# Altium PCB autonomiczny_odkurzacz_pcb.PcbDoc
Units mm, origin at the board's own origin, x right, y up, seen from the top; angles counter-clockwise.
Board outline 62.55 x 71.25 mm, 2 copper layers (Signal Top Layer, Signal Bottom Layer), stack 0.142 mm thick; 18 components, 44 nets, 169 pads, 11 vias.
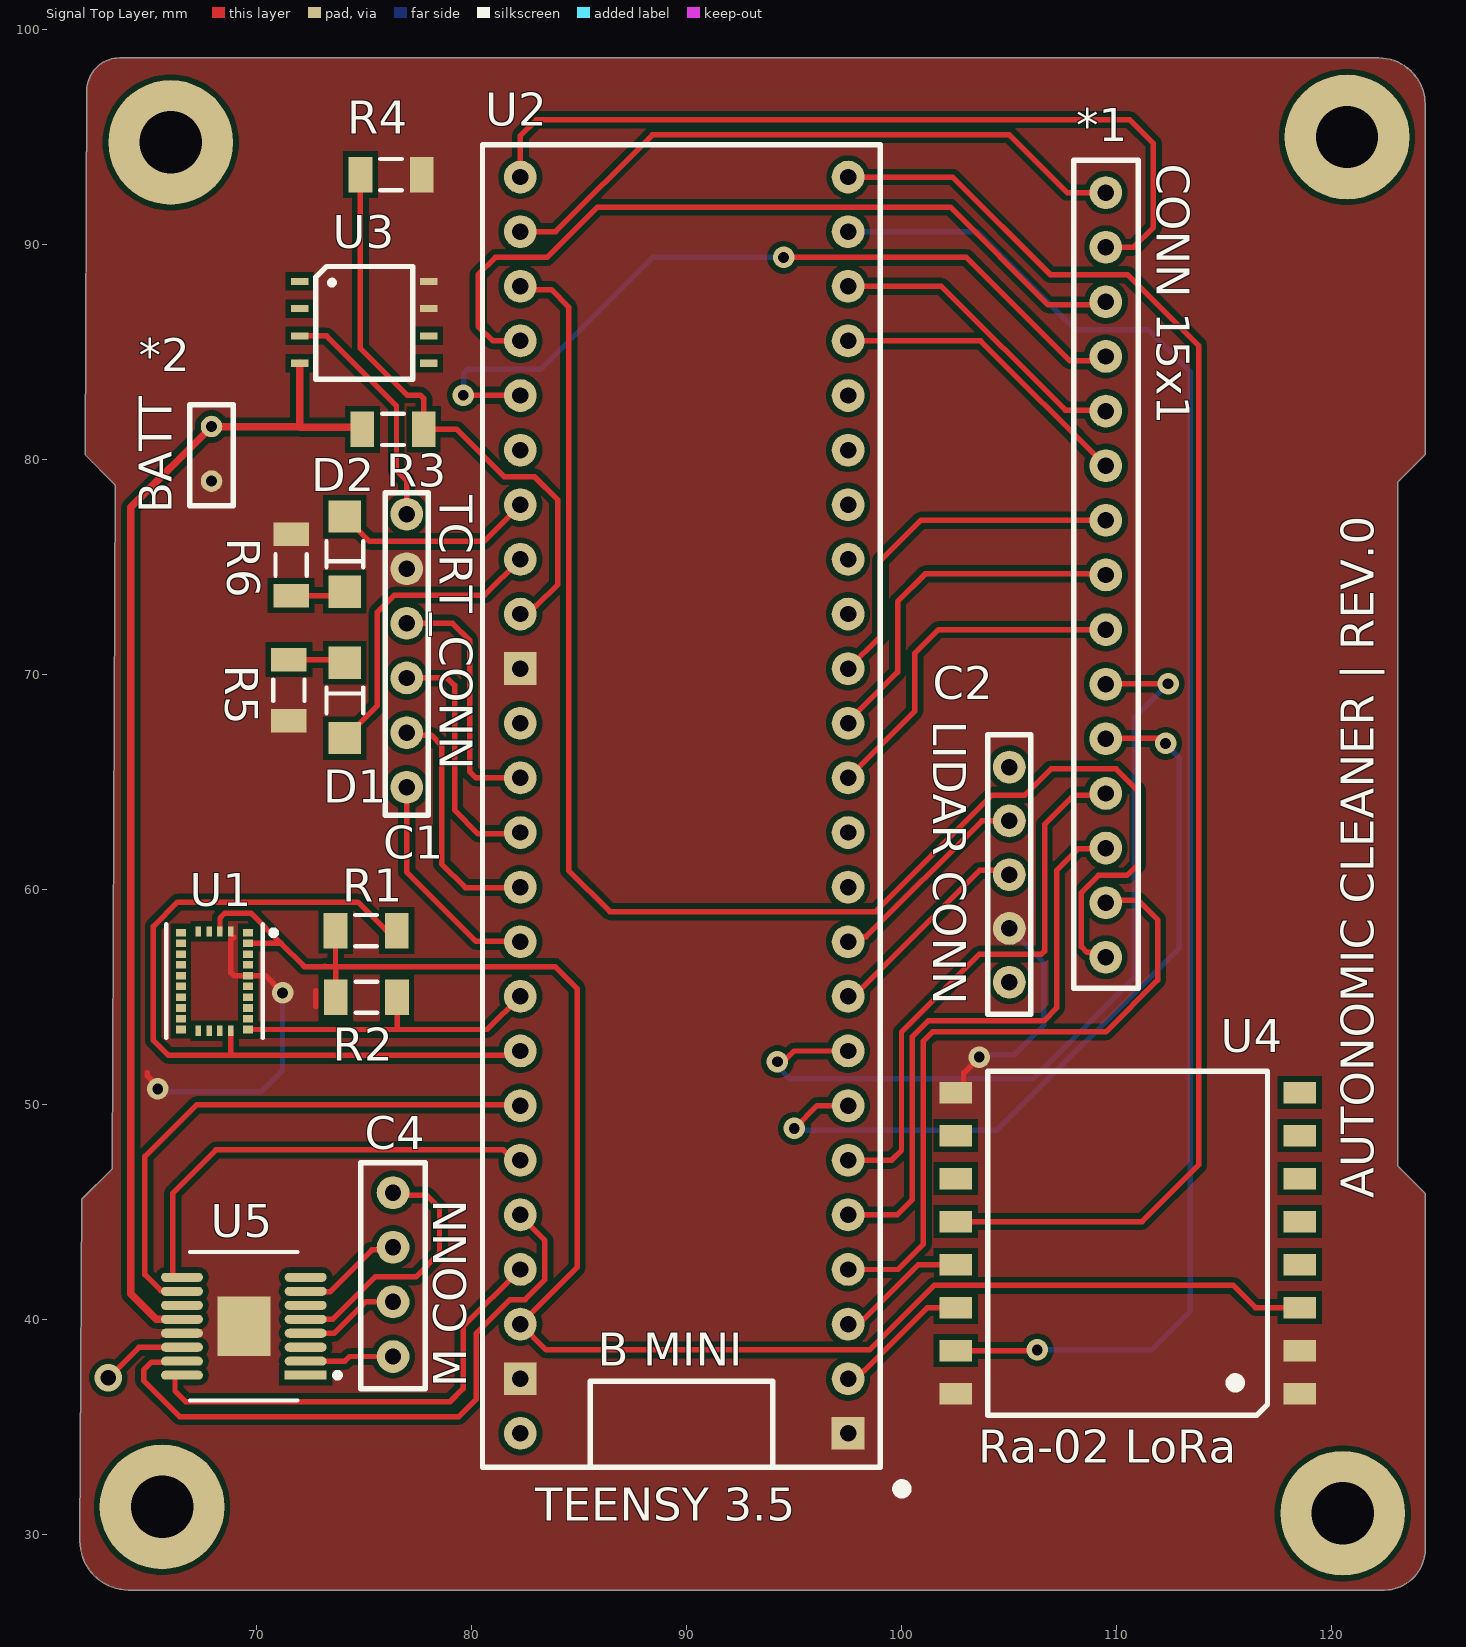
[diagram p0: Signal Top Layer view]
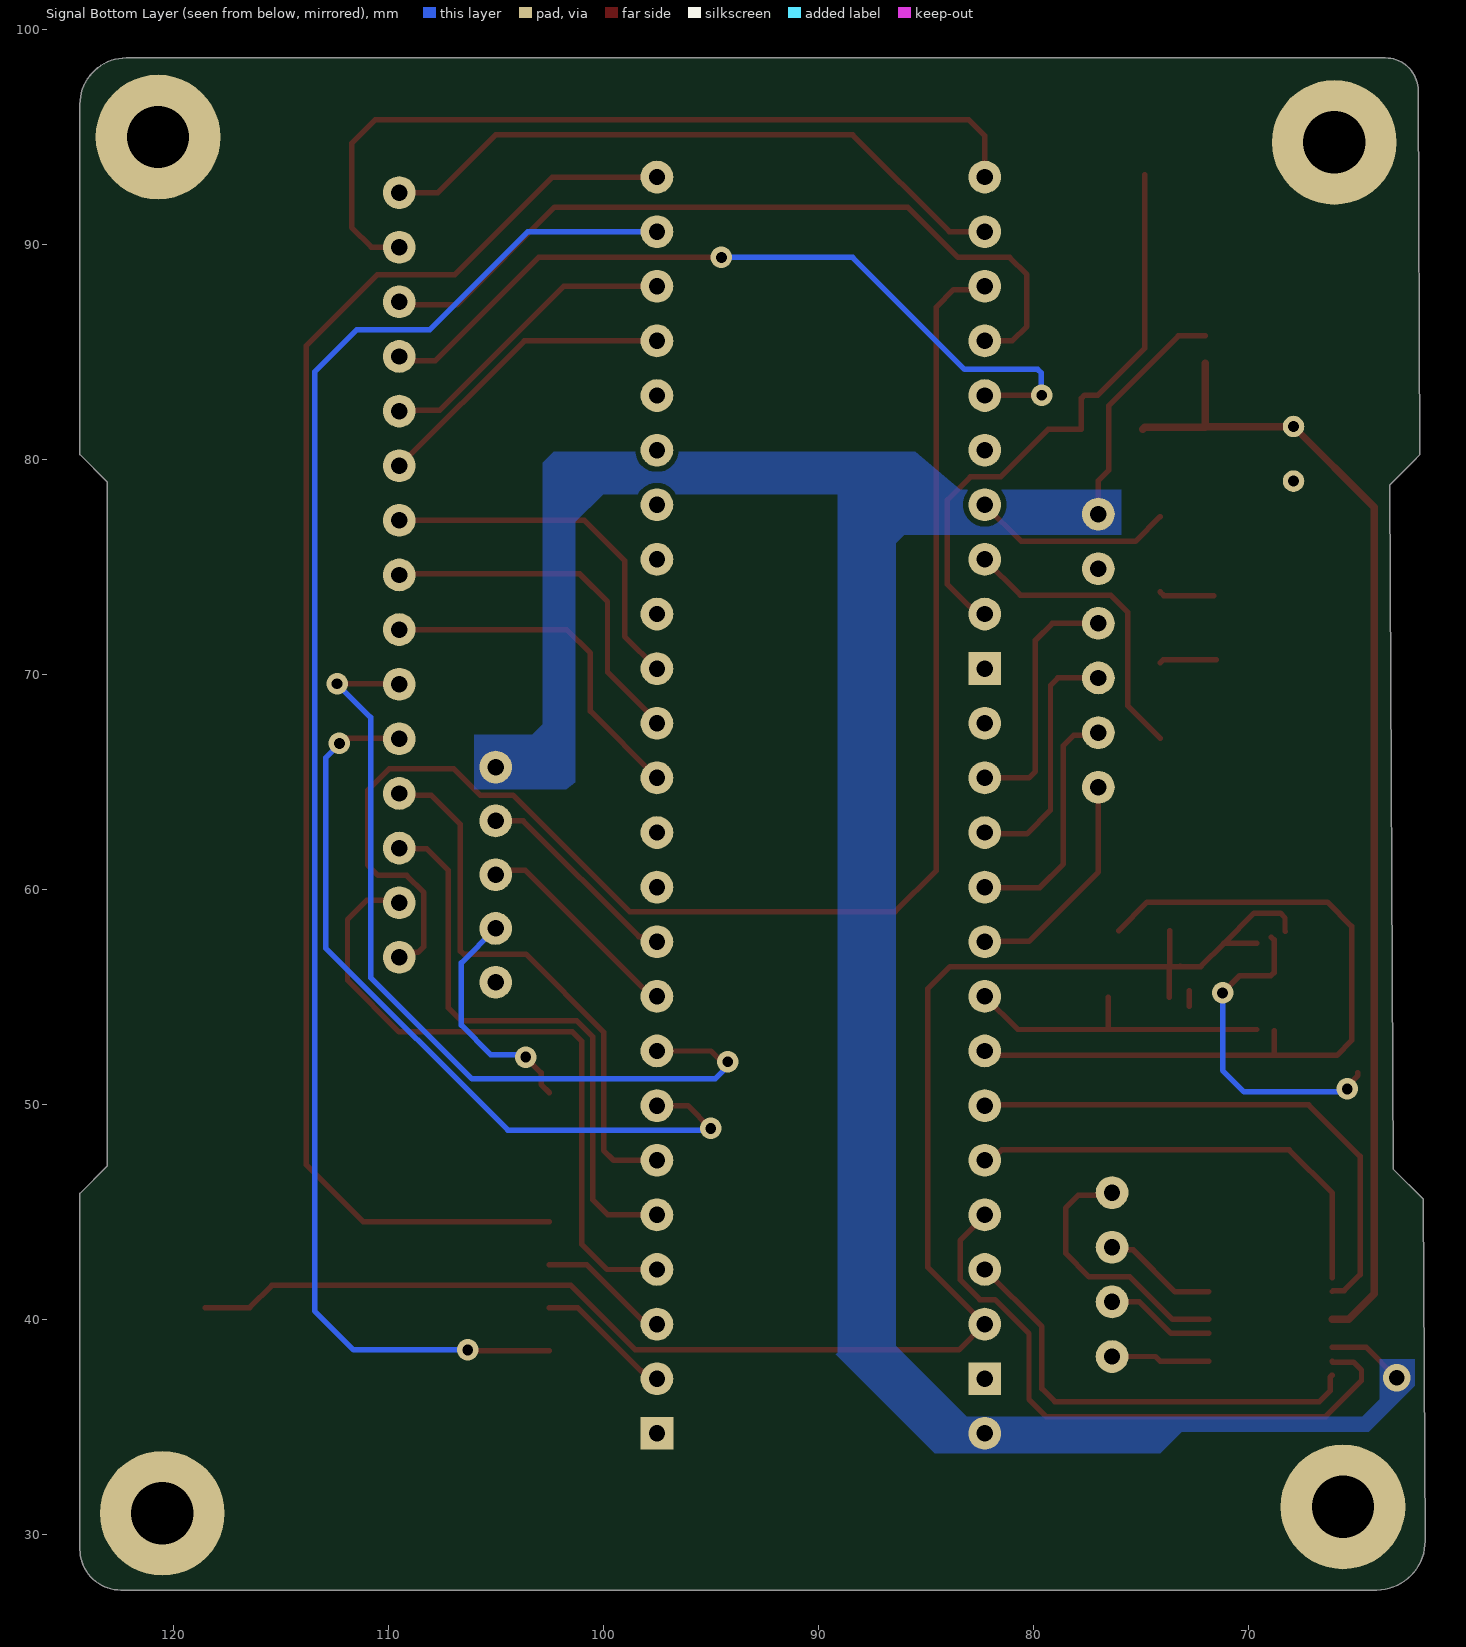
[diagram p1: Signal Bottom Layer view, seen from below]

## Layer stack, top to bottom
Top Solder: solder mask 0.0102, Solder Resist, Dk 3.5
Signal Top Layer: signal copper 0.0356
Dielectric 1: prepreg 0.0711, PP-006, Dk 4.1
Signal Bottom Layer: signal copper 0.0356
Bottom Solder: solder mask 0.0102, Solder Resist, Dk 3.5

## Board outline
61.781,29.728 61.856,45.608 63.274,47.013 63.425,78.813 63.039,79.203 62.36,79.888 62.021,80.231 62.102,97.154 cw(c63.627,97.154) 63.627,98.679 122.174,98.679 cw(c122.174,96.52) 124.333,96.52 124.333,80.232 123.063,78.962 123.063,47.149 124.333,45.879 124.333,29.337 cw(c122.428,29.337) 122.428,27.432 64.033,27.433 cw(c64.054,29.706)

## Design rules (kind name [scope] priority, off if disabled: settings)
Clearance [All] p1: gap=0.254 ignorepadtopadclearanceinfootprint=TRUE except(0.1: Arc-SMDPad Track-SMDPad)
ComponentClearance [All] p1: gap=0.05 collisioncheckmode=3 verticalgap=0.05 showdistances=FALSE
PolygonConnect [All] p1: connectstyle=Direct reliefconductorwidth=0.254 reliefentries=4 polygonreliefangle="90 Angle" airgapwidth=0.254
RoutingVias [All] p1: holewidth=0.711 width=1.27 viastyle="Through Hole" minholewidth=0.2 minwidth=0.4 maxholewidth=4 maxwidth=5
SolderMaskExpansion [All] p1: expansion=0.102 istentingtop=FALSE
SupplyNets "Schematic Supply Nets_3" [InNet('+12')] p1: voltage=0.000
SupplyNets "Schematic Supply Nets_2" [InNet('3.3V')] p2: voltage=0.000
SupplyNets "Schematic Supply Nets_1" [InNet('+5')] p3: voltage=0.000
SupplyNets "Schematic Supply Nets" [InNet('GND')] p4: voltage=0.000
Width [All] p1: maxlimit=1 minlimit=0.05 preferedwidth=0.254 minimp=50.000000 maximp=50.000000 favimp=50.000000
29 further rules are at their usual default settings.

## Components (designator, comment, footprint, x,y, rotation, side; value= is the part's Value field where it differs from the comment)
*1 "conn_15" PCBComponent_1#1 109.486,92.416 r180 top
*2 "batt" conn_2 67.9,79 r0 top
C1 "tcrt5000" PCBComponent_1#2 78.053,78.516 r180 top
C2 "a2m8_lidar" PCBComponent_1#3 105,65.7 r180 top
C4 "motor_conn" PCBComponent_1#4 76.339,38.294 r0 top
D1 "HSMG-C150" FP-HSMG-C150-MFG 74.1,68.8 r270 top
D2 "HSMG-C150" FP-HSMG-C150-MFG 74.1,75.6 r90 top
R1 "4.7k" RESC3216X70X50NL05T20 75.1,55 r180 top
R2 "4.7k" RESC3216X70X50NL05T20 75.089,58.1 r180 top
R3 "ERJ-8GEY0R00V" RESC3216X70X50NL05T20 76.339,81.403 r180 top
R4 "ERJ-8GEY0R00V" RESC3216X70X50NL05T20 76.25,93.25 r180 top
R5 "300R" RESC3216X70X50NL05T20 71.5,69.275 r270 top
R6 "300R" RESC3216X70X50NL05T20 71.6,75.1 r90 top
U1 "BNO055" FP-BNO055-MFG 68.038,55.75 r0 top
U2 "TEENSY" PCBComponent_1#5 97.5,93.14 r180 top
U3 "XL2011E1" PCBComponent_1#6 72,84.48 r0 top
U4 "LORA RA-02" PCBComponent_1#7 118.503,50.569 r180 top
U5 "DRV8833PWPR" FP-PWP0016C-IPC_A 69.4,39.7 r180 top

## Footprints (in the part's own frame and the unit in brackets; to place one, negate y for a bottom-side part, rotate by r counter-clockwise, add the part's x,y. Pads: shape width x height; smd on the part's side, far side on the other; paste and mask are expansions set on the pad)
conn_2 [mm]
  round 1 hole 0.5: 0(0,0) 1(0,2.54)
  silkscreen extent -1.02,-1.14 1.02,3.56
FP-BNO055-MFG [mm]
  rect 0.475x0.35 smd paste+0 mask-1000: 1(1.562,2.25) 6(-1.562,2.25) 7(-1.562,1.75) 8(-1.562,1.25) 9(-1.562,0.75) 10(-1.562,0.25) 11(-1.562,-0.25) 12(-1.562,-0.75) 13(-1.562,-1.25) 14(-1.562,-1.75) 15(-1.562,-2.25) 20(1.562,-2.25) 21(1.562,-1.75) 22(1.562,-1.25) 23(1.562,-0.75) 24(1.562,-0.25) 25(1.562,0.25) 26(1.562,0.75) 27(1.562,1.25) 28(1.562,1.75)
  rect 0.25x0.475 smd paste+0 mask-1000: 2(0.75,2.312) 3(0.25,2.312) 4(-0.25,2.312) 5(-0.75,2.312) 16(-0.75,-2.312) 17(-0.25,-2.312) 18(0.25,-2.312) 19(0.75,-2.312)
  silkscreen extent -2.25,-2.65 2.88,2.65, body extent -2.45,-3.15 2.45,3.15, height 0.25
FP-HSMG-C150-MFG [mm]
  rect 1.5x1.5 smd paste+0 mask+0: 1(-1.75,0) 2(1.75,0)
  silkscreen extent -0.6,-0.85 0.6,0.85, body extent -2.6,-0.95 2.6,0.95, height 0.25
FP-PWP0016C-IPC_A [mm]
  rect 1.955x0.421 smd paste+0 mask+0: 1(-2.875,2.275)
  rrect100% 1.955x0.421 smd paste+0 mask+0: 2(-2.875,1.625) 3(-2.875,0.975) 4(-2.875,0.325) 5(-2.875,-0.325) 6(-2.875,-0.975) 7(-2.875,-1.625) 8(-2.875,-2.275) 9(2.875,-2.275) 10(2.875,-1.625) 11(2.875,-0.975) 12(2.875,-0.325) 13(2.875,0.325) 14(2.875,0.975) 15(2.875,1.625) 16(2.875,2.275)
  rect 2.46x2.77 smd paste-1000 mask+0: 17(0,0)
  silkscreen extent -4.48,-3.45 2.5,3.45, body extent -4.35,-3 4.35,3, height 0.25
PCBComponent_1#1 [mil]
  round 60 hole 30: 0(0,0) 1(0,100) 2(0,200) 3(0,300) 4(0,400) 5(0,500) 6(0,600) 7(0,700) 8(0,800) 9(0,900) 10(0,1000) 11(0,1100) 12(0,1200) 13(0,1300) 14(0,1400)
  silkscreen extent -59,-59 59,1457
PCBComponent_1#2 [mil]
  round 60 hole 30: 0(42.48,41.34) 1(42.48,141.34) 2(42.48,241.34) 3(42.48,341.34) 4(42.48,441.34) 5(42.48,541.34)
  silkscreen extent 3,2 82,593
PCBComponent_1#3 [mil]
  round 60 hole 30: 0(0,0) 1(0,98.43) 2(0,196.85) 3(0,295.28) 4(0,393.7)
  silkscreen extent -39,-59 39,453
PCBComponent_1#4 [mil]
  round 60 hole 30: 0(0,0) 1(0,100) 2(0,200) 3(0,300)
  silkscreen extent -59,-59 59,354
PCBComponent_1#5 [mil]
  rect 60x60 hole 30: 0(0,2300) 25(600,2200) 38(600,900)
  round 60 hole 30: 1(0,2200) 2(0,2100) 3(0,2000) 4(0,1900) 5(0,1800) 6(0,1700) 7(0,1600) 8(0,1500) 9(0,1400) 10(0,1300) 11(0,1200) 12(0,1100) 13(0,1000) 14(0,900) 15(0,800) 16(0,700) 17(0,600) 18(0,500) 19(0,400) 20(0,300) 21(0,200) 22(0,100) 23(0,0) 24(600,2300) 26(600,2100) 27(600,2000) 28(600,1900) 29(600,1800) 30(600,1700) 31(600,1600) 32(600,1500) 33(600,1400) 34(600,1300) 35(600,1200) 36(600,1100) 37(600,1000) 39(600,800) 40(600,700) 41(600,600) 42(600,500) 43(600,400) 44(600,300) 45(600,200) 46(600,100) 47(600,0)
  silkscreen extent -106,-59 669,2409
PCBComponent_1#6 [mil]
  rect 31.5x12.99 smd: 0(0,150) 1(0,100) 2(0,50) 3(0,0) 4(236.22,0) 5(236.22,50) 6(236.22,100) 7(236.22,150)
  silkscreen extent 30,-30 207,177
PCBComponent_1#7 [mil]
  rect 60x39.37 smd: 0(629.92,0) 1(629.92,78.74) 2(629.92,157.48) 3(629.92,236.22) 4(629.92,314.96) 5(629.92,393.7) 6(629.92,472.44) 7(629.92,551.18) 8(0,0) 9(0,78.74) 10(0,157.48) 11(0,236.22) 12(0,314.96) 13(0,393.7) 14(0,472.44) 15(0,551.18)
  silkscreen extent 59,-39 571,591
RESC3216X70X50NL05T20 [mm] "Chip Resistor, 2-Leads, Body 3.20x1.60mm, IPC Medium Density"
  rect 1.1x1.65 smd: 1(-1.425,0) 2(1.425,0)
  silkscreen extent -0.5,-0.72 0.5,0.72, body extent -1.63,-0.82 1.62,0.82, height 0.7

## Part data
*1: library part CMP-005-000023-1, Design Item ID=conn_15, Source=MySchLib.SchLib
*2: library part conn_2
C1: library part CMP-005-000004-1, Design Item ID=tcrt, Source=MySchLib.SchLib
C4: library part CMP-005-000026-1, Design Item ID=motor_conn, Source=MySchLib.SchLib
D1 D2: library part CMP-2000-05061-2, "LED GREEN DIFFUSED 1206 SMD", Colour=Green, Forward Current=20mA, Forward Voltage=2.2V, Manufacturer=Broadcom, Max Junction Temp=+95°C, Power Dissipation=65mW, Reverse Voltage=5V, Temperature="-40°C to +85°C", Temperature Range High=+85°C, Temperature Range Low=-40°C, Automotive=No, Category=Diode, ComponentLink2Description=Datasheet, ComponentLink2URL=https://docs.broadcom.com/docs/AV02-0551EN, Device Class L1=Optoelectronics, Device Class L2=LEDs, Device Class L3=unset, Digikey Description="LED GREEN DIFFUSED 1206 SMD", Height=1.2mm, Ipc Land Pattern Name=DIOCP320160X55, Lead Free=Yes, Led Orientation="Top View", Luminous Intensity=15mcd, Manufacturer Part Number=HSMG-C150, Mouser Description="LED Uni-Color Green 570nm 2-Pin Chip LED T/R", Octopart=https://octopart.com/hsmg-c150-broadcom-71131304, Package=HSMG-C150, Peak Emmision Wavelength=570nm, RoHS=TRUE, Viewing Angle=170°, Wavelength=572nm
R1 R2 R5 R6: library part CMP-2003-00541-1, Manufacturer=Panasonic, Part Number=ERJ-8GEY0R00V
R3 R4: library part CMP-2003-00541-1, Manufacturer=Panasonic, Part Number=ERJ-8GEY0R00V
U1: library part CMP-2000-05075-4, "IMU ACCEL/GYRO/MAG I2C 28LGA", Case/Package=LGA, Max Operating Temperature=85°C, Min Operating Temperature=-40°C, Lead Free="Lead Free", Mount="Surface Mount", Output Type=I2C, Packaging="Tape and Reel", Sensor Type=Accelerometer
U2: library part CMP-005-000022-1, Design Item ID=teensy_3_5, Source=MySchLib.SchLib
U3: library part CMP-005-000018-1, Design Item ID=xl2011e1, Source=MySchLib.SchLib
U4: library part lora_ra02
U5: library part CMP-1529-00004-3, "IC MOTOR DRIVER PAR 16HTSSOP", Case/Package=HTSSOP, Max Operating Temperature=85°C, Max Output Current=2A, Max Supply Voltage=10.8V, Min Operating Temperature=-40°C, Min Supply Voltage=2.7V, Nominal Supply Current=3mA, Output Current=1.5A, Package Quantity=2000, Fault Protection="Over Temperature", Interface=PWM, Lead Free="Lead Free", Number of Outputs=2, Number of Pins=16, Output Current per Channel=1.5A, Packaging="Tape and Reel", Radiation Hardening=No, REACH SVHC="No SVHC", RMS Current (Irms)=1.5A, RoHS Compliant=Yes, Series=DRV8833, Supply Current=3mA, Technology=NMOS

## Free pads (board coordinates)
  round 5.8 hole 2.9: 2(65.6,31.3) 2(66,94.75) 2(120.5,31) 2(120.7,95)

## Via types
v1: diameter 1, hole 0.5, Signal Top Layer to Signal Bottom Layer, 10 vias
v2: diameter 1.27, hole 0.711, Signal Top Layer to Signal Bottom Layer, 1 vias

## Nets (pads, with @x,y where several pads share a name; then routed paths per layer and width w, separated by ;. In a path a pad name is that pad's centre, name@x,y a point inside that pad or via, vN(x,y) a via of type N, cw(c..) or ccw(c..) an arc to the next point about the centre after c; other vN are vias at no path point)
0: *1.0 U2.46 | length 30.2
  Signal Top Layer w0.254: U2.46 83.9,90.6 88.4,95.1 105,95.1 107.684,92.416 *1.0
1: *1.1 U2.47 | length 38.6
  Signal Top Layer w0.254: U2.47 82.26,95.06 83,95.8 110.6,95.8 111.7,94.7 111.7,90.8 110.776,89.876 *1.1
2: *1.2 U2.44 | length 37.1
  Signal Top Layer w0.254: U2.44 80.98,85.52 80.3,86.2 80.3,88.6 81.1,89.4 83.5,89.4 85.843,91.743 102.257,91.743 106.8,87.2 109.35,87.2 *1.2
3: *1.3 U2.43 | length 37.9
  Signal Top Layer w0.254: v1@79.6,83 79.61,82.99 82.25,82.99 U2.43 ; v1(94.5,89.4) 103,89.4 107.8,84.6 109.29,84.6 *1.3
  Signal Bottom Layer w0.254: v1@79.6,83 79.63,83.03 79.63,84.03 79.8,84.2 83.2,84.2 88.4,89.4 v1(94.5,89.4)
  other v1: 79.605,82.995
3.3V: R1.2 R2.2 U1.3 U1.28 U2.26 U4.13 | length 78.6
  Signal Top Layer w0.24: 68.512,58.912 68.289,58.689 U1.3@68.289,58.064 ; U1.3 U1.3@68.289,58.064
  Signal Top Layer w0.254: 68.512,58.912 69.728,58.912 71.134,57.506 ; U1.28 70.282,57.5 70.288,57.506 71.134,57.506 ; 72.198,56.442 71.134,57.506 ; 72.216,56.424 73.2,56.424 ; 73.175,56.449 73.2,56.424 ; R2.2 73.664,56.487 73.6,56.424 ; R1.2 73.675,56.349 73.6,56.424 ; U4.13 116.441,40.569 115.41,41.6 101.5,41.6 98.5,38.6 83.46,38.6 U2.26 84.9,42.44 84.9,55.397 83.873,56.424 73.6,56.424 ; 73.2,56.424 73.6,56.424
4: *1.4 U2.21 | length 14.4
  Signal Top Layer w0.254: U2.21 101.84,88.06 107.6,82.3 109.442,82.3 *1.4
5: *1.5 U2.20 | length 14.4
  Signal Top Layer w0.254: U2.20 103.662,85.52 109.466,79.716 *1.5
6: *1.6 U2.14 | length 16.9
  Signal Top Layer w0.254: U2.14 99,71.78 99,75.3 100.876,77.176 *1.6
7: *1.7 U2.13 | length 16.9
  Signal Top Layer w0.254: U2.13 97.5,67.813 99.8,70.113 99.8,73.4 101.092,74.692 109.43,74.692 *1.7
8: *1.8 U2.12 | length 16.4
  Signal Top Layer w0.254: U2.12 100.6,68.3 100.6,71 101.696,72.096 *1.8
9: *1.9 U2.7 | length 39.8
  Signal Top Layer w0.254: v1(94.214,52.002) 94.489,52.002 94.986,52.5 U2.7 ; *1.9 109.508,69.578 v1(112.378,69.578) v1@112.4,69.6
  Signal Bottom Layer w0.254: v1(94.214,52.002) 94.214,51.735 94.265,51.735 94.8,51.2 106.1,51.2 110.814,55.914 110.814,68.014 v1@112.4,69.6
10: *1.10 U2.6 | length 37.1
  Signal Top Layer w0.254: v1(95,48.9) 96.06,49.96 U2.6 ; *1.10 109.507,67.037 111.888,67.037 112.125,66.8 v1@112.4,66.8
  Signal Bottom Layer w0.254: v1(95,48.9) 95.083,48.817 104.435,48.817 112.892,57.274 112.892,66.143 112.4,66.635 v1@112.4,66.8
  other v1: 112.263,66.8
11: *1.11 U2.5 | length 25.7
  Signal Top Layer w0.254: U2.5 99.52,47.42 99.984,47.884 99.984,53.384 103.6,57 106.488,57 106.637,57.149 106.637,63.037 108,64.4 109.41,64.4 *1.11
12: *1.12 U2.4 | length 27.2
  Signal Top Layer w0.254: U2.4 99.78,44.88 100.492,45.592 100.492,53.174 101.218,53.9 106.6,53.9 107.2,54.5 107.2,60.9 108.2,61.9 109.45,61.9 *1.12
13: *1.13 U2.3 | length 31.1
  Signal Top Layer w0.254: U2.3 99.822,42.34 101,43.518 101,52.963 101.429,53.392 109.492,53.392 111.89,55.79 111.89,58.61 111,59.5 109.59,59.5 *1.13
14: *1.14 U2.45 | length 69.7
  Signal Top Layer w0.254: U2.45 82.42,87.9 83.7,87.9 84.508,87.092 84.508,60.892 86.423,58.977 98.777,58.977 104.2,64.4 105.72,64.4 106.939,65.619 109.959,65.619 110.958,64.621 110.958,61.158 110.466,60.666 109.14,60.666 108.343,59.869 108.343,57.357 108.611,57.089 109.253,57.089 *1.14
SCL: R2.1 U1.19 U2.31 | length 35.7
  Signal Top Layer w0.254: U1.19 68.788,52.388 68.7,52.3 ; R2.1@76.025,58.1 74.705,59.42 66.32,59.42 65.2,58.3 65.2,52.988 65.888,52.3 68.7,52.3 ; U2.31 82.06,52.3 68.7,52.3
+5: C1.0 C2.0 U2.24 U3.2 U5.14 | length 14.7
  Signal Top Layer w0.254: v2(63.1,37.3) 64.516,38.716 U5.14@66.098,38.716 ; U3.2 73.25,85.75 76.5,82.5 76.5,79.5 76.974,79.026 C1.0
+12: *2.1 R3.2 U3.3 U5.12 | length 54.4
  Signal Top Layer w0.35: U5.12@66.098,40.016 65.33,40.016 64.144,41.202 64.144,77.784 *2.1 67.92,81.52 71.98,81.52 72,81.5 ; U3.3 72,81.5 ; R3.2 74.817,81.5 72,81.5
A0: C1.2 U2.36 | length 11.8
  Signal Top Layer w0.254: C1.2 79.114,72.386 79.9,71.6 79.9,65.5 80.2,65.2 U2.36
A1: C1.3 U2.35 | length 11.7
  Signal Top Layer w0.254: C1.3 78.854,69.846 79.2,69.5 79.2,63.7 80.3,62.6 82.2,62.6 U2.35
A2: C1.4 U2.34 | length 11.5
  Signal Top Layer w0.254: C1.4 77.097,67.183 78.117,67.183 78.6,66.7 78.6,61.2 79.7,60.1 82.24,60.1 U2.34
A3: C1.5 U2.33 | length 10.6
  Signal Top Layer w0.254: C1.5 76.974,60.826 80.2,57.6 82.24,57.6 U2.33
AIN1: U2.27 U5.16 | length 21.3
  Signal Top Layer w0.254: U5.16@66.098,37.416 66.123,37.416 66.2,37.339 66.2,36.7 66.7,36.2 79,36.2 79.6,36.8 79.6,39.68 U2.27
AIN2: U2.28 U5.15 | length 29.3
  Signal Top Layer w0.254: U5.15@66.098,38.066 66.066,38.034 65.112,38.034 64.739,37.661 64.739,37.171 66.41,35.5 79.4,35.5 80.2,36.3 80.2,39.356 81.787,40.943 82.479,40.943 83.403,41.867 83.403,43.688 82.26,44.831 U2.28
AN_BAT: R3.1 R4.2 U2.39 | length 27.3
  Signal Top Layer w0.254: R4.2 74.825,85.175 77,83 77.615,83 77.764,82.851 R3.1 79.312,81.403 81.515,79.2 82.929,79.2 84,78.129 84,74.2 82.994,73.194 82.978,73.194 82.604,72.82 U2.39
AOUT1: C4.0 U5.2 | length 4.6
  Signal Top Layer w0.254: U5.2@71.848,38.066 74.093,38.066 74.321,38.294 C4.0
AOUT2: C4.1 U5.4 | length 5.1
  Signal Top Layer w0.254: U5.4@71.848,39.366 73.594,39.366 75.062,40.834 C4.1
BIN1: U2.29 U5.9 | length 21.1
  Signal Top Layer w0.254: U5.9@66.098,41.966 66.098,45.898 68.1,47.9 81.476,47.9 81.956,47.42 U2.29
BIN2: U2.30 U5.10 | length 25.6
  Signal Top Layer w0.254: U5.10@66.098,41.316 66.057,41.357 65.543,41.357 64.8,42.1 64.8,47.6 67.2,50 82.22,50 U2.30
BOUT1: C4.2 U5.7 | length 5.4
  Signal Top Layer w0.254: U5.7@71.848,41.316 71.864,41.3 73.4,41.3 75.352,43.252 76.217,43.252 C4.2
BOUT2: C4.3 U5.5 | length 12.5
  Signal Top Layer w0.254: U5.5@71.848,40.016 73.526,40.016 75.51,42 77.4,42 78.5,43.1 78.5,45.2 77.9,45.8 76.453,45.8 C4.3
CS: U2.22 U4.6 | length 74
  Signal Top Layer w0.254: U4.6 106.269,38.569 v1(106.3,38.6)
  Signal Bottom Layer w0.254: U2.22 103.398,90.6 103.503,90.6 107.903,86.2 108.057,86.047 111.453,86.047 112.741,84.759 113.416,84.084 113.416,40.416 111.6,38.6 v1(106.3,38.6)
D0: D1.2 U2.40 | length 14.2
  Signal Top Layer w0.254: D1.2 75.6,68.55 75.6,72.9 76.4,73.7 80.6,73.7 U2.40
D1: D2.2 U2.41 | length 9.3
  Signal Top Layer w0.254: D2.2 75.25,76.2 80.56,76.2 U2.41
GND: *2.0 C1.1 C2.3 R4.1 R5.2 R6.2 U1.2 U1.25 U2.0 U2.25 U2.38 U3.6 U3.7 U4.0 U4.7 U4.14 U4.15 U5.13 U5.17 | length 27
  Signal Top Layer w0.254: 64.906,51.5 64.906,51.369 65.4,50.875 v1@65.4,50.6 ; 68.938,57.8 68.8,57.662 68.8,56.149 68.949,56 U1.25 70.4,56 v1(71.2,55.2) ; 72.744,54.575 72.744,55.3 ; U4.0 102.509,50.569 102.882,50.942 102.882,51.482 103.6,52.2 v1(103.6,52.216)
  Signal Bottom Layer w0.254: v1@65.4,50.6 70.2,50.6 71.2,51.6 v1(71.2,55.2) ; v1(103.6,52.216) 103.714,52.33 105.23,52.33 106.6,53.7 106.6,56.6 C2.3
  other v1: 65.4,50.737
MISO: U2.2 U4.4 | length 6.1
  Signal Top Layer w0.254: U2.2 97.743,40.043 98.243,40.043 100.769,42.569 U4.4
MOSI: U2.1 U4.5 | length 6.4
  Signal Top Layer w0.254: U2.1 97.844,37.26 98.209,37.625 98.243,37.625 101.187,40.569 U4.5
NetD1_1: D1.1 R5.1 | length 2.7
  Signal Top Layer w0.254: R5.1 73.95,70.7 D1.1
NetD2_1: D2.1 R6.1 | length 2.6
  Signal Top Layer w0.254: R6.1 73.925,73.675 D2.1
RX1: C2.2 U2.8 | length 9.9
  Signal Top Layer w0.254: U2.8 97.759,55.04 103.619,60.9 C2.2@105,60.9
SCK: U2.23 U4.3 | length 70
  Signal Top Layer w0.254: U2.23 102.36,93.14 106.9,88.6 110.5,88.6 113.8,85.3 113.8,47.2 111.169,44.569 U4.3
SDA: R1.1 U1.20 U2.32 | length 14.8
  Signal Top Layer w0.254: U1.20 76.6,53.5 ; R1.1 76.525,53.575 76.6,53.5 ; U2.32 80.72,53.5 76.6,53.5
TX1: C2.1 U2.9 | length 9.8
  Signal Top Layer w0.254: U2.9 97.743,57.823 98.341,57.823 103.718,63.2 C2.1
pads on no net: C2.4 U1.1 U1.4 U1.5 U1.6 U1.7 U1.8 U1.9 U1.10 U1.11 U1.12 U1.13 U1.14 U1.15 U1.16 U1.17 U1.18 U1.21 U1.22 U1.23 U1.24 U1.26 U1.27 U2.10 U2.11 U2.15 U2.16 U2.17 U2.18 U2.19 U2.37 U2.42 U3.0 U3.1 U3.4 U3.5 U4.1 U4.2 U4.8 U4.9 U4.10 U4.11 U4.12 U5.1 U5.3 U5.6 U5.8 U5.11

## Polygon pours and split planes (outlines as drawn)
GND on Signal Top Layer "layer_1_gnd" (solid, pour order 0): 61.781,29.728 61.856,45.608 63.274,47.013 63.425,78.813 63.039,79.203 62.36,79.888 62.021,80.231 62.102,97.154 cw(c63.627,97.154) 63.627,98.679 122.174,98.679 cw(c122.174,96.52) 124.333,96.52 124.333,80.232 123.063,78.962 123.063,47.149 124.333,45.879 124.333,29.337 cw(c122.428,29.337) 122.428,27.432 64.033,27.433 cw(c64.054,29.706)
+5 on Signal Bottom Layer "+5_L02_P001" (solid, pour order 1): 78,78.6 75.9,78.6 75.9,76.5 86,76.5 87.9,78.4 102.3,78.4 102.3,80.364 85.5,80.364 83.4,78.6 78.5,78.6 78.3,78.6
+5 on Signal Bottom Layer "+5_L02_P006" (solid, pour order 6): 102.4,68.1 103.3,67.2 106,67.2 106,64.68 102.333,64.68 102.263,64.68 102.2,65.3
+5 on Signal Bottom Layer "+5_L02_P005" (solid, pour order 5): 100,78.4 101.3,77.1 101.3,65 101.727,64.68 102.8,64.68 102.8,64.44 102.8,77.6 102.8,78.4 102.8,79.85 102.293,80.357
+5 on Signal Bottom Layer "+5" (solid, pour order 2): 85.15,77.35 86.4,76.1 86.4,38.8 83.1,35.5 64.7,35.5 63.9,36.3 63.9,38.174 62.272,38.174 62.272,36.928 64.4,34.8 73.1,34.8 74.1,33.8 84.594,33.8 89.186,38.392 89.1,38.477 89.1,78.962 86.762,78.962

## Silkscreen, mask and mechanical layers (free items; w line width, h text height)
Top Overlay:
  text "AUTONOMIC CLEANER | REV.0" at 121.946,45.654 h1.52 r90
Bottom Solder:
  the board outline again, w0.254

## Text inside footprints (layer, text, board x,y; h text height)
*1: Top Overlay "CONN 15x1" at 111.854,93.746 h1.52 r270
*2: Top Overlay "BATT" at 66.046,77.494 h1.52 r90
C1: Top Overlay "TCRT_CONN" at 78.508,78.346 h1.52 r270
C2: Top Overlay "LIDAR CONN" at 101.454,67.846 h1.52 r270
C4: Top Overlay "M CONN" at 79.746,36.854 h1.52 r90
U2: Top Overlay "TEENSY 3.5" at 82.954,30.654 h1.52; Top Overlay "B MINI" at 85.854,37.854 h1.52
U4: Top Overlay "Ra-02 LoRa" at 103.554,33.354 h1.52